# Altium PCB FPW1-0-2.PcbDoc (part 11 of 11)
Units mm, origin at the board's own origin, x right, y up, seen from the top; angles counter-clockwise.
Board outline 85 x 56 mm, 4 copper layers (Top Layer, GND_Plane, 3V3_Plane, Bottom Layer); 182 components, 321 nets, 1106 pads, 360 vias.
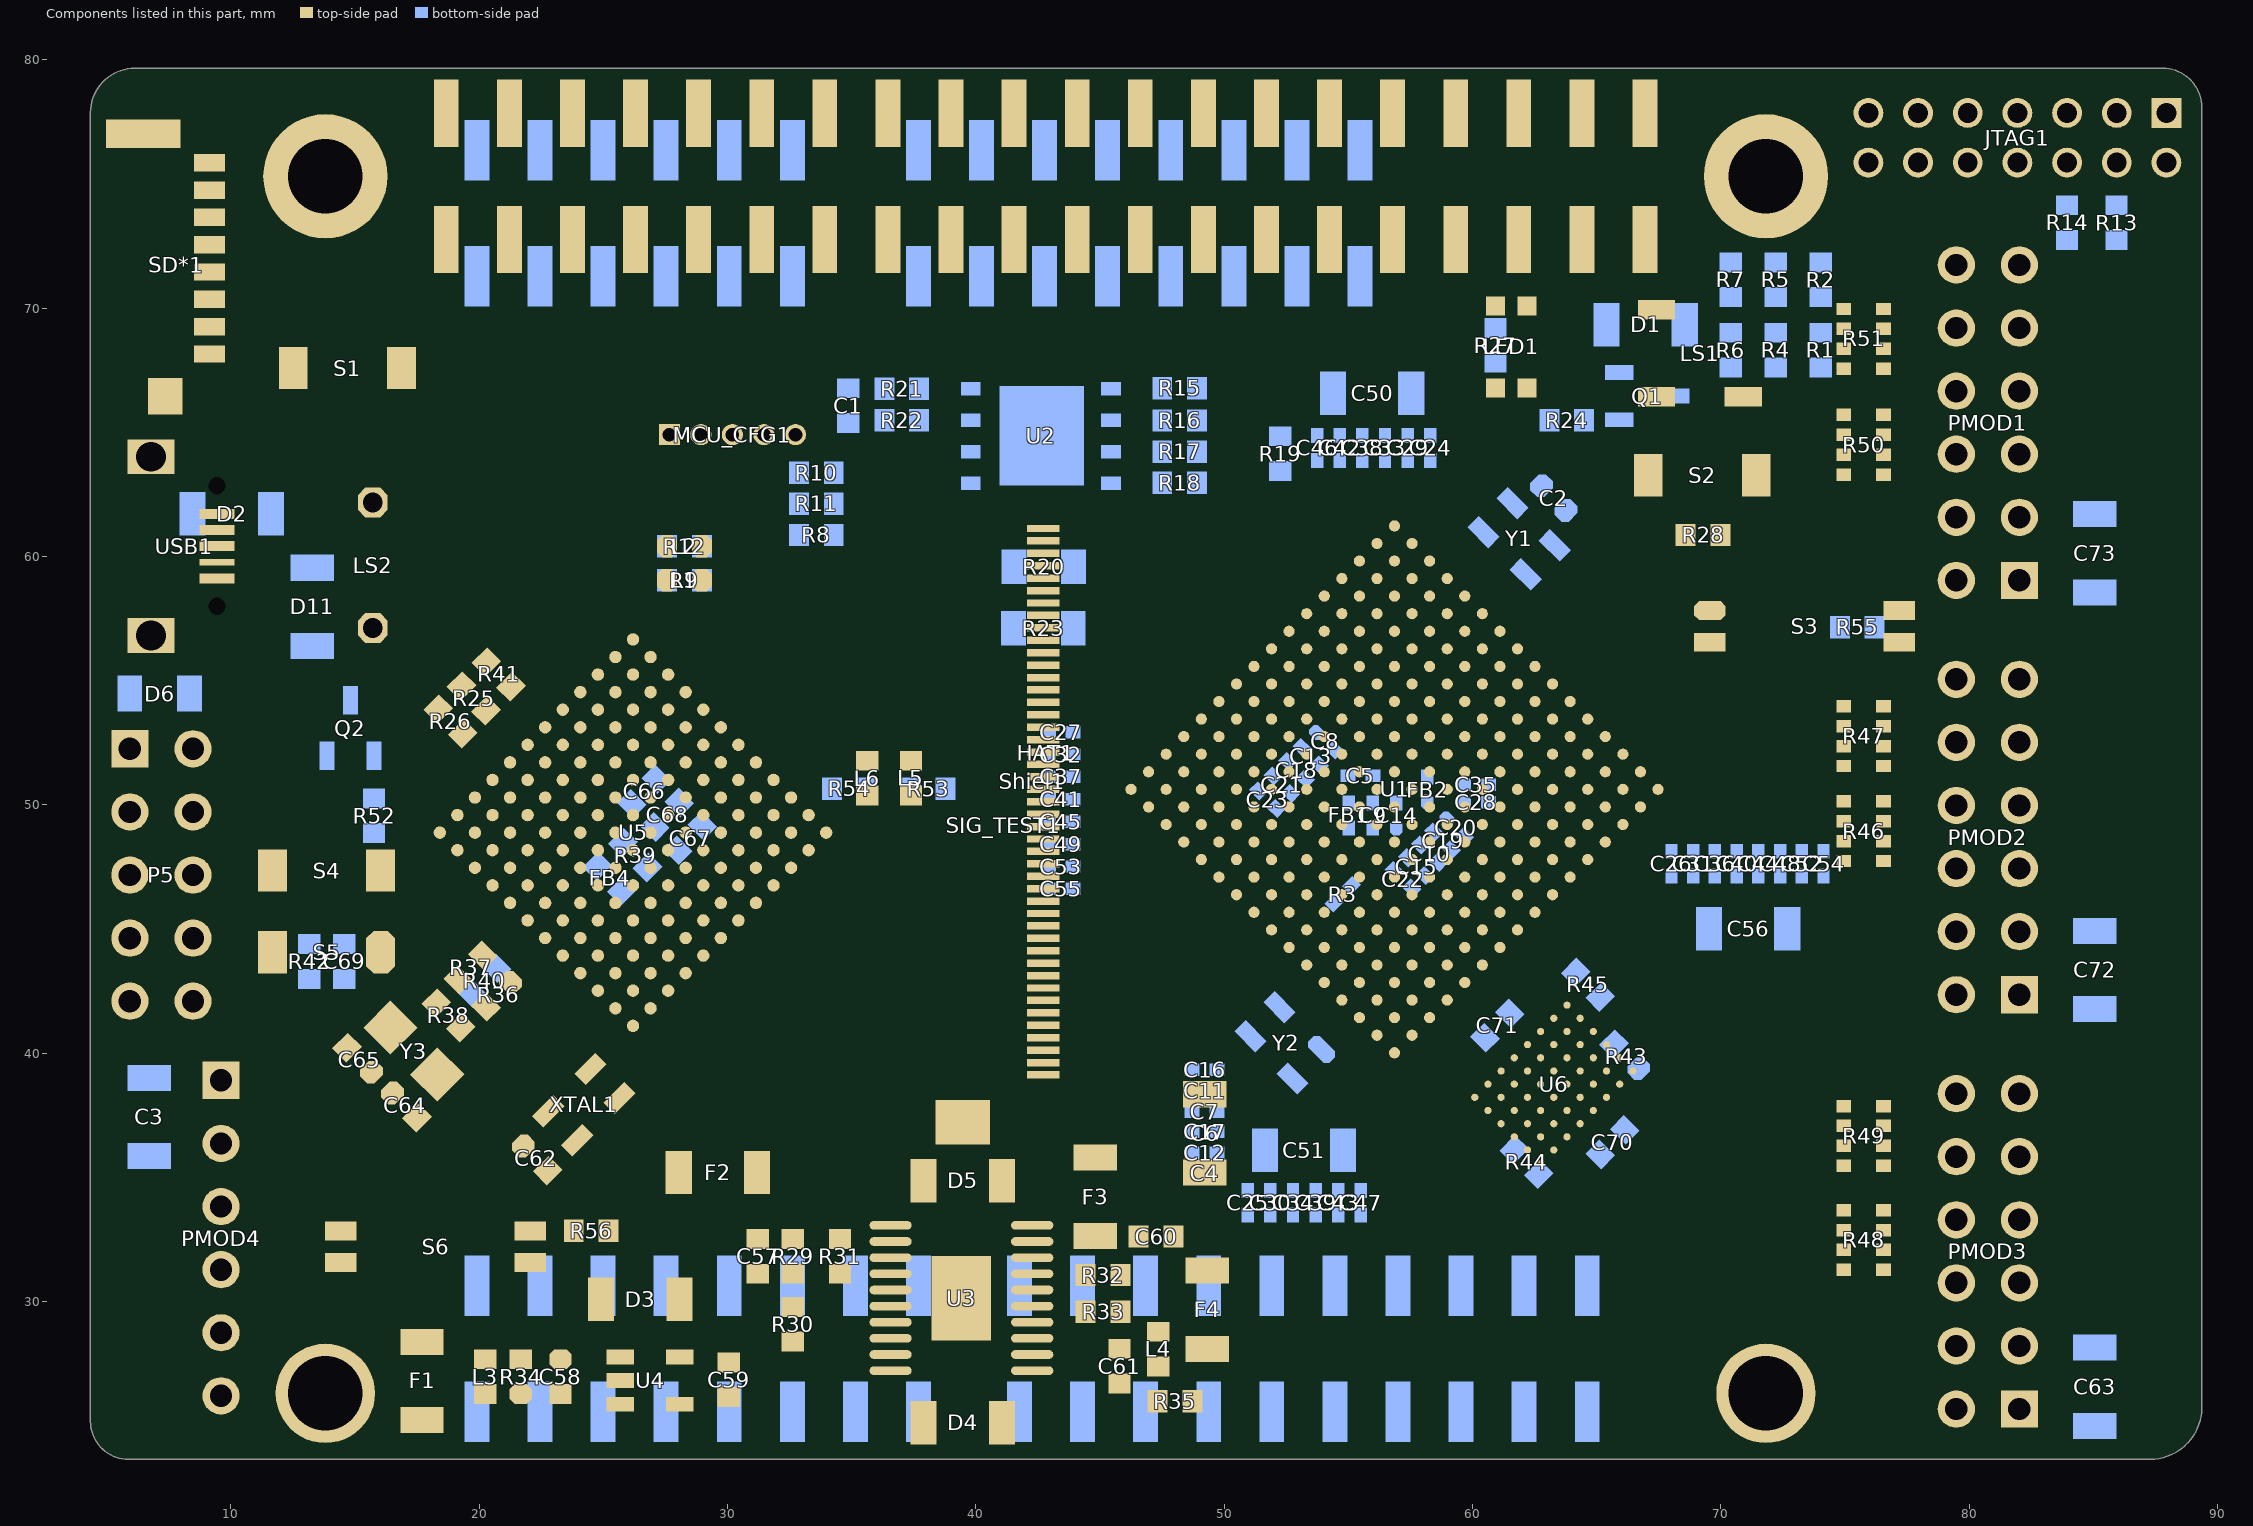
[diagram p13: the components of this part, seen from the top]

## Via types
v1: diameter 0.45, hole 0.2, Top Layer to Bottom Layer, tented both sides, 280 vias
v2: diameter 0.61, hole 0.33, Top Layer to Bottom Layer, tented both sides, 40 vias
v3: diameter 0.403, hole 0.2, Top Layer to Bottom Layer, tented both sides, 15 vias
v4: diameter 0.5, hole 0.2, Top Layer to Bottom Layer, tented both sides, 12 vias
v5: diameter 0.864, hole 0.508, Top Layer to Bottom Layer, tented both sides, 11 vias
v6: diameter 0.864, hole 0.356, Top Layer to Bottom Layer, tented both sides, 1 vias
v7: diameter 0.864, hole 0.381, Top Layer to Bottom Layer, tented both sides, 1 vias

## Nets (pads, with @x,y where several pads share a name; then routed paths per layer and width w, separated by ;. In a path a pad name is that pad's centre, name@x,y a point inside that pad or via, vN(x,y) a via of type N, cw(c..) or ccw(c..) an arc to the next point about the centre after c; other vN are vias at no path point) (continued)
copper on no net: (continued)
  Top Layer w0.025: 88.214,53.226 88.214,53.387 ; 88.214,54.699 88.214,54.936 ; 88.214,57.925 88.214,59.686 ; 88.214,63.919 88.214,64.08 ; 88.214,65.062 88.214,65.198 ; 88.214,67.246 88.214,67.407 ; 88.214,67.602 88.214,67.763 ; 88.214,68.161 88.214,68.22 ; 88.214,68.644 88.214,68.652 ; 88.214,69.888 88.214,70.1 ; 88.24,45.453 88.24,45.817 ; 88.24,47.053 88.24,47.24 ; 88.24,47.307 88.24,47.57 ; 88.24,48.501 88.24,48.764 ; 88.24,49.06 88.24,49.17 ; 88.24,50.355 88.24,50.491 ; 88.24,51.625 88.24,51.736 ; 88.24,52.286 88.24,52.447 ; 88.24,53.226 88.24,53.387 ; 88.24,54.724 88.24,54.936 ; 88.24,57.925 88.24,59.711 ; 88.24,63.944 88.24,64.08 ; 88.24,65.062 88.24,65.198 ; 88.24,67.246 88.24,67.407 ; 88.24,67.475 88.24,67.509 ; 88.24,67.602 88.24,67.763 ; 88.24,69.913 88.24,70.074 ; 88.265,45.453 88.265,45.792 ; 88.265,47.079 88.265,47.57 ; 88.265,48.501 88.265,48.764 ; 88.265,49.06 88.265,49.17 ; 88.265,50.33 88.265,50.491 ; 88.265,51.625 88.265,51.736 ; 88.265,52.311 88.265,52.498 ; 88.265,53.226 88.265,53.412 ; 88.265,54.724 88.265,54.936 ; 88.265,57.925 88.265,59.711 ; 88.265,63.944 88.265,64.08 ; 88.265,65.062 88.265,65.198 ; 88.265,67.272 88.265,67.407 ; 88.265,67.475 88.265,67.763 ; 88.265,69.939 88.265,70.049 ; 88.29,45.453 88.29,45.792 ; 88.29,47.104 88.29,47.545 ; 88.29,48.527 88.29,48.764 ; 88.29,49.06 88.29,49.17 ; 88.29,50.33 88.29,50.466 ; 88.29,51.625 88.29,51.736 ; 88.29,52.337 88.29,52.523 ; 88.29,53.226 88.29,53.437 ; 88.29,54.724 88.29,54.911 ; 88.29,57.925 88.29,59.711 ; 88.29,63.97 88.29,64.08 ; 88.29,65.062 88.29,65.198 ; 88.29,67.297 88.29,67.407 ; 88.29,67.501 88.29,67.763 ; 88.29,69.939 88.29,69.998 ; 88.316,45.479 88.316,45.767 ; 88.316,47.13 88.316,47.545 ; 88.316,48.527 88.316,48.738 ; 88.316,49.06 88.316,49.196 ; 88.316,50.127 88.316,50.186 ; 88.316,50.279 88.316,50.466 ; 88.316,51.651 88.316,51.71 ; 88.316,52.362 88.316,52.599 ; 88.316,53.226 88.316,53.463 ; 88.316,54.724 88.316,54.885 ; 88.316,57.95 88.316,58.746 ; 88.316,59.144 88.316,59.711 ; 88.316,63.97 88.316,64.08 ; 88.316,65.062 88.316,65.198 ; 88.316,67.323 88.316,67.357 ; 88.316,67.501 88.316,67.763 ; 88.341,45.504 88.341,45.741 ; 88.341,47.13 88.341,47.545 ; 88.341,48.527 88.341,48.738 ; 88.341,49.085 88.341,49.196 ; 88.341,50.152 88.341,50.466 ; 88.341,52.387 88.341,52.675 ; 88.341,53.226 88.341,53.463 ; 88.341,54.724 88.341,54.86 ; 88.341,57.95 88.341,58.467 ; 88.341,59.449 88.341,59.711 ; 88.341,63.995 88.341,64.055 ; 88.341,65.062 88.341,65.198 ; 88.341,67.501 88.341,67.763 ; 88.367,45.529 88.367,45.741 ; 88.367,47.18 88.367,47.545 ; 88.367,48.552 88.367,48.738 ; 88.367,49.085 88.367,49.196 ; 88.367,50.178 88.367,50.466 ; 88.367,52.413 88.367,52.777 ; 88.367,53.175 88.367,53.463 ; 88.367,54.724 88.367,54.86 ; 88.367,58.001 88.367,58.34 ; 88.367,64.021 88.367,64.055 ; 88.367,65.062 88.367,65.198 ; 88.367,67.526 88.367,67.763 ; 88.392,45.555 88.392,45.716 ; 88.392,47.206 88.392,47.545 ; 88.392,48.552 88.392,48.713 ; 88.392,49.111 88.392,49.196 ; 88.392,50.203 88.392,50.466 ; 88.392,52.438 88.392,52.802 ; 88.392,52.946 88.392,52.98 ; 88.392,53.099 88.392,53.463 ; 88.392,54.699 88.392,54.834 ; 88.392,58.026 88.392,58.238 ; 88.392,65.062 88.392,65.198 ; 88.392,67.526 88.392,67.763 ; 88.417,45.58 88.417,45.716 ; 88.417,47.257 88.417,47.519 ; 88.417,48.578 88.417,48.713 ; 88.417,49.111 88.417,49.196 ; 88.417,50.203 88.417,50.44 ; 88.417,52.464 88.417,53.463 ; 88.417,54.699 88.417,54.809 ; 88.417,65.062 88.417,65.198 ; 88.417,67.526 88.417,67.763 ; 88.443,45.631 88.443,45.69 ; 88.443,47.307 88.443,47.519 ; 88.443,48.578 88.443,48.713 ; 88.443,49.136 88.443,49.196 ; 88.443,50.228 88.443,50.44 ; 88.443,52.489 88.443,53.463 ; 88.443,54.673 88.443,54.784 ; 88.443,65.062 88.443,65.172 ; 88.443,67.551 88.443,67.738 ; 88.468,47.358 88.468,47.494 ; 88.468,48.603 88.468,48.713 ; 88.468,49.162 88.468,49.17 ; 88.468,50.254 88.468,50.44 ; 88.468,52.54 88.468,53.437 ; 88.468,54.648 88.468,54.758 ; 88.468,65.062 88.468,65.172 ; 88.468,67.551 88.468,67.738 ; 88.494,48.628 88.494,48.688 ; 88.494,50.254 88.494,50.415 ; 88.494,52.591 88.494,53.437 ; 88.494,54.623 88.494,54.733 ; 88.494,65.062 88.494,65.172 ; 88.494,67.577 88.494,67.738 ; 88.519,48.679 88.519,48.688 ; 88.519,50.279 88.519,50.415 ; 88.519,52.642 88.519,53.412 ; 88.519,54.597 88.519,54.707 ; 88.519,65.087 88.519,65.172 ; 88.519,67.577 88.519,67.738 ; 88.544,50.279 88.544,50.389 ; 88.544,52.692 88.544,53.387 ; 88.544,54.597 88.544,54.682 ; 88.544,65.087 88.544,65.172 ; 88.544,67.627 88.544,67.738 ; 88.57,50.305 88.57,50.389 ; 88.57,52.743 88.57,53.336 ; 88.57,54.572 88.57,54.657 ; 88.57,65.113 88.57,65.172 ; 88.57,67.653 88.57,67.738 ; 88.595,50.305 88.595,50.364 ; 88.595,52.819 88.595,53.285 ; 88.595,54.546 88.595,54.631 ; 88.595,65.113 88.595,65.147 ; 88.595,67.704 88.595,67.712 ; 88.621,52.946 88.621,53.133 ; 88.621,54.521 88.621,54.606 ; 88.646,54.496 88.646,54.555 ; 88.671,54.47 88.671,54.53 ; 88.697,54.496 88.697,54.504
  Top Layer w0.051: 53.179,29.934 53.501,29.934 ; 53.179,29.985 53.653,29.985 ; 53.179,30.035 54.009,30.035 ; 53.23,30.086 54.009,30.086 ; 53.332,30.797 53.602,30.797 ; 53.332,30.848 53.602,30.848 ; 53.382,28.765 53.907,28.765 ; 53.382,28.816 53.704,28.816 ; 53.382,28.867 53.602,28.867 ; 53.382,28.918 53.602,28.918 ; 53.382,28.969 53.653,28.969 ; 53.382,29.019 53.653,29.019 ; 53.382,29.07 53.704,29.07 ; 53.382,30.137 53.958,30.137 ; 53.382,30.696 53.704,30.696 ; 53.382,30.747 53.653,30.747 ; 53.382,30.899 53.552,30.899 ; 53.433,28.715 54.517,28.715 ; 53.433,29.121 53.704,29.121 ; 53.433,29.172 53.755,29.172 ; 53.433,30.594 53.755,30.594 ; 53.433,30.645 53.704,30.645 ; 53.484,28.664 55.431,28.664 ; 53.484,29.223 53.755,29.223 ; 53.484,29.273 53.806,29.273 ; 53.484,30.493 53.806,30.493 ; 53.484,30.543 53.755,30.543 ; 53.535,29.324 53.806,29.324 ; 53.535,29.375 53.856,29.375 ; 53.535,30.188 53.856,30.188 ; 53.535,30.391 53.806,30.391 ; 53.535,30.442 53.806,30.442 ; 53.586,28.613 55.888,28.613 ; 53.586,29.426 53.856,29.426 ; 53.586,29.477 53.907,29.477 ; 53.586,30.29 53.806,30.29 ; 53.586,30.34 53.806,30.34 ; 53.636,29.527 53.907,29.527 ; 53.687,29.578 53.958,29.578 ; 53.687,29.629 53.958,29.629 ; 53.738,29.68 54.009,29.68 ; 53.738,29.731 54.009,29.731 ; 53.738,29.781 54.009,29.781 ; 53.738,29.985 54.06,29.985 ; 53.789,28.562 55.939,28.562 ; 53.789,29.832 54.06,29.832 ; 53.789,29.883 54.06,29.883 ; 53.789,29.934 54.06,29.934 ; 54.094,30.29 54.669,30.29 ; 54.094,30.34 55.634,30.34 ; 54.094,30.391 55.634,30.391 ; 54.094,30.696 54.771,30.696 ; 54.144,28.867 54.72,28.867 ; 54.144,28.918 55.584,28.918 ; 54.144,28.969 55.736,28.969 ; 54.144,29.019 55.736,29.019 ; 54.144,29.07 54.415,29.07 ; 54.144,29.121 54.415,29.121 ; 54.144,29.172 54.415,29.172 ; 54.144,29.223 54.415,29.223 ; 54.144,29.273 54.415,29.273 ; 54.144,29.324 54.415,29.324 ; 54.144,29.375 54.568,29.375 ; 54.144,29.426 55.736,29.426 ; 54.144,29.477 55.736,29.477 ; 54.144,29.527 55.685,29.527 ; 54.144,29.578 55.634,29.578 ; 54.144,29.629 54.415,29.629 ; 54.144,29.68 54.415,29.68 ; 54.144,29.731 54.364,29.731 ; 54.144,29.781 54.415,29.781 ; 54.144,29.832 55.126,29.832 ; 54.144,29.883 55.634,29.883 ; 54.144,29.934 55.634,29.934 ; 54.144,29.985 55.634,29.985 ; 54.144,30.035 54.364,30.035 ; 54.144,30.086 54.364,30.086 ; 54.144,30.137 54.364,30.137 ; 54.144,30.188 54.364,30.188 ; 54.144,30.239 54.364,30.239 ; 54.144,30.442 55.584,30.442 ; 54.144,30.594 54.364,30.594 ; 54.144,30.645 54.568,30.645 ; 54.144,30.747 55.025,30.747 ; 54.195,28.816 54.364,28.816 ; 54.246,30.797 55.228,30.797 ; 54.348,28.511 55.939,28.511 ; 54.5,30.848 55.431,30.848 ; 54.551,30.493 55.482,30.493 ; 54.602,29.07 55.736,29.07 ; 54.703,30.899 55.482,30.899 ; 54.957,30.95 55.482,30.95 ; 55.008,30.035 55.634,30.035 ; 55.11,29.629 55.431,29.629 ; 55.16,31.001 55.482,31.001 ; 55.211,28.461 55.888,28.461 ; 55.364,30.29 55.634,30.29 ; 55.414,29.832 55.634,29.832 ; 55.414,30.086 55.685,30.086 ; 55.414,30.137 55.685,30.137 ; 55.414,30.188 55.685,30.188 ; 55.414,30.239 55.685,30.239 ; 55.465,29.121 55.736,29.121 ; 55.465,29.375 55.736,29.375 ; 55.516,29.172 55.736,29.172 ; 55.516,29.223 55.736,29.223 ; 55.516,29.273 55.736,29.273 ; 55.516,29.324 55.736,29.324 ; 56.329,28.562 56.65,28.562 ; 56.329,28.613 56.701,28.613 ; 56.329,29.883 56.752,29.883 ; 56.329,29.934 56.65,29.934 ; 56.329,29.985 56.549,29.985 ; 56.38,28.511 56.549,28.511 ; 56.38,28.664 56.752,28.664 ; 56.38,29.832 56.854,29.832 ; 56.38,30.34 58.886,30.34 ; 56.38,30.391 58.936,30.391 ; 56.38,30.442 58.936,30.442 ; 56.43,28.715 56.803,28.715 ; 56.43,29.781 56.904,29.781 ; 56.43,30.29 57.158,30.29 ; 56.481,28.765 56.904,28.765 ; 56.532,28.816 56.955,28.816 ; 56.532,29.731 57.006,29.731 ; 56.634,28.867 57.006,28.867 ; 56.634,29.68 57.057,29.68 ; 56.684,28.918 57.057,28.918 ; 56.684,29.629 57.108,29.629 ; 56.735,28.969 57.108,28.969 ; 56.786,29.019 57.158,29.019 ; 56.786,29.578 57.158,29.578 ; 56.786,30.493 58.936,30.493 ; 56.837,29.07 57.158,29.07 ; 56.837,29.527 57.158,29.527 ; 56.888,29.121 57.209,29.121 ; 56.888,29.477 57.209,29.477 ; 56.938,29.172 57.209,29.172 ; 56.938,29.223 57.209,29.223 ; 56.938,29.375 57.209,29.375 ; 56.938,29.426 57.209,29.426 ; 56.989,29.273 57.209,29.273 ; 56.989,29.324 57.209,29.324 ; 57.345,30.899 57.616,30.899 ; 57.345,30.95 57.616,30.95 ; 57.396,30.086 57.666,30.086 ; 57.396,30.137 57.666,30.137 ; 57.396,30.188 57.666,30.188 ; 57.396,30.239 57.666,30.239 ; 57.396,30.29 57.666,30.29 ; 57.396,30.543 57.666,30.543 ; 57.396,30.594 57.666,30.594 ; 57.396,30.645 57.666,30.645 ; 57.396,30.696 57.666,30.696 ; 57.396,30.747 57.616,30.747 ; 57.396,30.797 57.616,30.797 ; 57.396,30.848 57.616,30.848 ; 57.396,31.001 57.616,31.001 ; 57.446,29.223 57.717,29.223 ; 57.446,29.273 57.717,29.273 ; 57.446,29.324 57.717,29.324 ; 57.446,29.375 57.717,29.375 ; 57.446,29.426 57.717,29.426 ; 57.446,29.477 57.717,29.477 ; 57.446,29.527 57.717,29.527 ; 57.446,29.578 57.717,29.578 ; 57.446,29.629 57.717,29.629 ; 57.446,29.68 57.717,29.68 ; 57.446,29.731 57.717,29.731 ; 57.446,29.781 57.717,29.781 ; 57.446,29.832 57.717,29.832 ; 57.446,29.883 57.717,29.883 ; 57.446,29.934 57.666,29.934 ; 57.446,29.985 57.666,29.985 ; 57.446,30.035 57.666,30.035 ; 57.446,31.051 57.565,31.051 ; 57.497,28.41 57.768,28.41 ; 57.497,28.461 57.768,28.461 ; 57.497,28.511 57.768,28.511 ; 57.497,28.562 57.768,28.562 ; 57.497,28.613 57.768,28.613 ; 57.497,28.664 57.768,28.664 ; 57.497,28.715 57.768,28.715 ; 57.497,28.765 57.768,28.765 ; 57.497,28.816 57.768,28.816 ; 57.497,28.867 57.768,28.867 ; 57.497,28.918 57.768,28.918 ; 57.497,28.969 57.768,28.969 ; 57.497,29.019 57.717,29.019 ; 57.497,29.07 57.717,29.07 ; 57.497,29.121 57.717,29.121 ; 57.497,29.172 57.717,29.172 ; 57.548,28.359 57.768,28.359 ; 57.904,29.07 58.225,29.07 ; 57.904,29.121 58.174,29.121 ; 57.904,29.172 58.174,29.172 ; 57.904,29.223 58.174,29.223 ; 57.904,29.273 58.174,29.273 ; 57.904,29.324 58.174,29.324 ; 57.904,29.375 58.225,29.375 ; 57.954,28.969 58.428,28.969 ; 57.954,29.019 58.327,29.019 ; 57.954,29.426 58.225,29.426 ; 57.954,29.477 58.276,29.477 ; 58.005,29.527 58.327,29.527 ; 58.005,29.578 58.378,29.578 ; 58.056,28.918 58.53,28.918 ; 58.056,29.629 58.428,29.629 ; 58.107,28.867 58.682,28.867 ; 58.107,29.68 58.479,29.68 ; 58.158,29.731 58.53,29.731 ; 58.158,30.899 58.581,30.899 ; 58.158,30.95 58.479,30.95 ; 58.158,31.001 58.378,31.001 ; 58.208,28.816 58.784,28.816 ; 58.208,29.781 58.632,29.781 ; 58.208,30.848 58.682,30.848 ; 58.259,30.797 58.784,30.797 ; 58.31,28.765 58.936,28.765 ; 58.31,29.832 58.682,29.832 ; 58.361,29.883 58.733,29.883 ; 58.361,30.747 58.835,30.747 ; 58.412,28.715 59.038,28.715 ; 58.412,29.934 58.784,29.934 ; 58.462,29.985 58.784,29.985 ; 58.462,30.696 58.886,30.696 ; 58.513,30.035 58.784,30.035 ; 58.564,28.664 59.038,28.664 ; 58.564,30.086 58.733,30.086 ; 58.564,30.645 58.886,30.645 ; 58.666,28.613 59.038,28.613 ; 58.666,30.594 58.835,30.594 ; 58.818,28.562 58.987,28.562 ; 59.428,28.765 61.984,28.765 ; 59.428,28.816 62.035,28.816 ; 59.478,28.715 60.918,28.715 ; 59.478,28.867 62.086,28.867 ; 59.732,29.223 61.781,29.223 ; 59.732,29.273 61.781,29.273 ; 59.732,29.324 61.781,29.324 ; 59.732,29.375 61.781,29.375 ; 59.732,29.426 60.003,29.426 ; 59.732,29.477 60.003,29.477 ; 59.732,29.527 60.003,29.527 ; 59.732,29.578 60.003,29.578 ; 59.732,29.629 60.003,29.629 ; 59.732,29.68 60.003,29.68 ; 59.732,29.731 60.003,29.731 ; 59.732,29.781 60.003,29.781 ; 59.732,29.832 60.003,29.832 ; 59.732,29.883 60.003,29.883 ; 59.732,29.934 60.003,29.934 ; 59.732,29.985 60.003,29.985 ; 59.732,30.035 60.003,30.035 ; 59.732,30.086 60.003,30.086 ; 59.732,30.137 60.003,30.137 ; 59.732,30.188 60.714,30.188 ; 59.732,30.239 61.832,30.239 ; 59.732,30.29 61.781,30.29 ; 59.732,30.34 61.73,30.34 ; 59.783,30.391 59.952,30.391 ; 59.834,29.172 60.257,29.172 ; 60.24,29.68 61.121,29.68 ; 60.24,29.731 61.324,29.731 ; 60.24,29.781 61.375,29.781 ; 60.24,29.832 61.324,29.832 ; 60.291,28.918 62.035,28.918 ; 60.393,30.848 60.664,30.848 ; 60.393,30.899 60.664,30.899 ; 60.393,30.95 60.664,30.95 ; 60.393,31.001 60.664,31.001 ; 60.393,31.051 60.613,31.051 ; 60.444,30.543 60.714,30.543 ; 60.444,30.594 61.07,30.594 ; 60.444,30.645 61.73,30.645 ; 60.444,30.696 61.781,30.696 ; 60.444,30.747 61.781,30.747 ; 60.444,30.797 60.714,30.797 ; 60.494,30.391 61.629,30.391 ; 60.494,30.442 60.765,30.442 ; 60.494,30.493 60.714,30.493 ; 60.596,28.969 60.867,28.969 ; 60.596,29.019 60.867,29.019 ; 60.596,29.07 60.867,29.07 ; 60.596,29.121 60.867,29.121 ; 60.596,29.172 60.867,29.172 ; 60.647,28.359 60.918,28.359 ; 60.647,28.41 60.918,28.41 ; 60.647,28.461 60.918,28.461 ; 60.647,28.511 60.918,28.511 ; 60.647,28.562 60.918,28.562 ; 60.647,28.613 60.918,28.613 ; 60.647,28.664 60.918,28.664 ; 60.698,28.308 60.867,28.308 ; 60.901,29.883 61.273,29.883 ; 60.901,30.797 61.781,30.797 ; 61.51,29.121 61.73,29.121 ; 61.51,29.172 61.781,29.172 ; 61.51,29.426 61.781,29.426 ; 61.51,30.188 61.832,30.188 ; 61.561,29.477 61.781,29.477 ; 61.561,29.527 61.832,29.527 ; 61.561,29.578 61.832,29.578 ; 61.561,29.629 61.832,29.629 ; 61.561,29.68 61.832,29.68 ; 61.561,29.731 61.832,29.731 ; 61.561,29.781 61.832,29.781 ; 61.561,30.137 61.832,30.137 ; 61.612,29.832 61.832,29.832 ; 61.612,29.883 61.883,29.883 ; 61.612,29.934 61.883,29.934 ; 61.612,29.985 61.883,29.985 ; 61.612,30.035 61.883,30.035 ; 61.612,30.086 61.883,30.086 ; 61.714,28.969 61.984,28.969 ; 62.476,28.41 62.746,28.41 ; 62.476,28.461 62.746,28.461 ; 62.476,29.578 62.899,29.578 ; 62.476,29.629 63.305,29.629 ; 62.476,29.68 63.712,29.68 ; 62.526,28.359 62.746,28.359 ; 62.526,28.511 62.746,28.511 ; 62.526,28.562 62.797,28.562 ; 62.526,28.613 62.797,28.613 ; 62.526,28.664 64.575,28.664 ; 62.526,28.715 64.118,28.715 ; 62.526,29.731 64.067,29.731 ; 62.577,28.765 63.61,28.765 ; 62.577,28.816 63.305,28.816 ; 62.577,28.867 62.848,28.867 ; 62.577,28.918 62.848,28.918 ; 62.577,30.391 64.626,30.391 ; 62.577,30.442 63.712,30.442 ; 62.628,28.969 62.899,28.969 ; 62.628,29.019 62.899,29.019 ; 62.628,29.07 62.899,29.07 ; 62.628,29.121 62.899,29.121 ; 62.628,29.172 62.899,29.172 ; 62.628,30.34 65.134,30.34 ; 62.679,29.223 62.95,29.223 ; 62.679,29.273 62.95,29.273 ; 62.679,29.324 64.016,29.324 ; 62.679,29.375 63.661,29.375 ; 62.679,30.493 63.661,30.493 ; 62.73,29.426 62.899,29.426 ; 62.78,29.781 64.067,29.781 ; 62.933,30.29 63.254,30.29 ; 62.933,30.543 63.204,30.543 ; 62.933,30.594 63.204,30.594 ; 62.933,30.645 63.204,30.645 ; 62.933,30.696 63.204,30.696 ; 62.933,30.747 63.204,30.747 ; 62.933,30.797 63.204,30.797 ; 62.933,30.848 63.204,30.848 ; 62.984,28.613 65.083,28.613 ; 62.984,29.527 63.254,29.527 ; 62.984,29.578 63.254,29.578 ; 62.984,29.832 64.067,29.832 ; 62.984,29.883 63.254,29.883 ; 62.984,29.934 63.254,29.934 ; 62.984,29.985 63.254,29.985 ; 62.984,30.035 63.254,30.035 ; 62.984,30.086 63.254,30.086 ; 62.984,30.137 63.254,30.137 ; 62.984,30.188 63.254,30.188 ; 62.984,30.239 63.204,30.239 ; 62.984,30.899 63.153,30.899 ; 63.034,28.867 63.305,28.867 ; 63.034,28.918 63.305,28.918 ; 63.034,28.969 63.305,28.969 ; 63.034,29.019 63.305,29.019 ; 63.034,29.07 63.305,29.07 ; 63.034,29.121 63.305,29.121 ; 63.034,29.172 63.356,29.172 ; 63.034,29.223 64.016,29.223 ; 63.034,29.273 64.016,29.273 ; 63.034,29.426 63.254,29.426 ; 63.034,29.477 63.254,29.477 ; 63.441,28.562 65.236,28.562 ; 63.593,29.883 63.712,29.883 ; 63.746,29.07 64.016,29.07 ; 63.746,29.121 64.016,29.121 ; 63.746,29.172 64.016,29.172 ; 63.746,29.375 64.626,29.375 ; 63.746,29.426 64.626,29.426 ; 63.796,28.969 64.423,28.969 ; 63.796,29.019 64.423,29.019 ; 63.796,29.477 64.016,29.477 ; 63.796,29.527 64.067,29.527 ; 63.796,29.578 64.067,29.578 ; 63.796,29.629 64.067,29.629 ; 63.796,29.68 64.067,29.68 ; 63.796,30.29 65.185,30.29 ; 63.847,28.918 64.423,28.918 ; 63.847,29.883 64.118,29.883 ; 63.847,29.934 64.118,29.934 ; 63.847,29.985 64.118,29.985 ; 63.847,30.035 64.118,30.035 ; 63.847,30.086 64.118,30.086 ; 63.847,30.137 64.118,30.137 ; 63.847,30.239 65.185,30.239 ; 63.847,30.442 64.016,30.442 ; 63.898,28.867 64.321,28.867 ; 63.898,30.188 64.118,30.188 ; 63.949,28.511 65.236,28.511 ; 64.101,29.324 64.677,29.324 ; 64.152,29.477 64.626,29.477 ; 64.203,29.527 64.677,29.527 ; 64.254,29.07 64.372,29.07 ; 64.254,30.188 65.185,30.188 ; 64.254,30.442 64.524,30.442 ; 64.254,30.493 64.524,30.493 ; 64.254,30.543 64.524,30.543 ; 64.254,30.594 64.524,30.594 ; 64.254,30.645 64.524,30.645 ; 64.254,30.696 64.524,30.696 ; 64.254,30.747 64.524,30.747 ; 64.254,30.797 64.524,30.797 ; 64.254,30.848 64.524,30.848 ; 64.254,30.899 64.524,30.899 ; 64.254,30.95 64.524,30.95 ; 64.254,31.001 64.524,31.001 ; 64.254,31.051 64.474,31.051 ; 64.304,29.578 64.778,29.578 ; 64.304,29.68 64.931,29.68 ; 64.304,29.731 65.032,29.731 ; 64.304,29.781 65.083,29.781 ; 64.304,29.832 64.575,29.832 ; 64.304,29.883 64.575,29.883 ; 64.304,29.934 64.575,29.934 ; 64.304,29.985 64.575,29.985 ; 64.304,30.035 64.575,30.035 ; 64.304,30.086 64.524,30.086 ; 64.304,30.137 64.524,30.137 ; 64.355,29.629 64.829,29.629 ; 64.406,29.223 64.728,29.223 ; 64.406,29.273 64.677,29.273 ; 64.457,28.461 65.236,28.461 ; 64.457,29.121 64.778,29.121 ; 64.457,29.172 64.728,29.172 ; 64.508,29.019 65.185,29.019 ; 64.508,29.07 64.778,29.07 ; 64.558,28.969 65.185,28.969 ; 64.609,28.918 65.134,28.918 ; 64.609,30.848 64.982,30.848 ; 64.609,30.899 64.931,30.899 ; 64.66,28.867 65.083,28.867 ; 64.66,30.797 64.982,30.797 ; 64.66,30.95 64.88,30.95 ; 64.711,29.832 65.083,29.832 ; 64.711,30.747 65.032,30.747 ; 64.762,28.816 64.982,28.816 ; 64.762,30.696 65.083,30.696 ; 64.812,29.883 65.083,29.883 ; 64.812,30.645 65.134,30.645 ; 64.863,30.594 65.185,30.594 ; 64.914,29.07 65.185,29.07 ; 64.914,29.934 65.083,29.934 ; 64.914,30.543 65.236,30.543 ; 64.965,28.41 65.185,28.41 ; 64.965,30.493 65.286,30.493 ; 65.016,29.121 65.083,29.121 ; 65.016,30.391 65.236,30.391 ; 65.016,30.442 65.286,30.442 ; 65.879,29.934 66.201,29.934 ; 65.879,29.985 66.15,29.985 ; 65.879,30.035 66.15,30.035 ; 65.879,30.086 66.15,30.086 ; 65.879,30.137 66.15,30.137 ; 65.879,30.188 66.15,30.188 ; 65.879,30.239 66.15,30.239 ; 65.879,30.29 66.15,30.29 ; 65.879,30.34 66.15,30.34 ; 65.879,30.391 66.15,30.391 ; 65.93,28.867 66.607,28.867 ; 65.93,28.918 66.201,28.918 ; 65.93,28.969 66.201,28.969 ; 65.93,29.019 66.556,29.019 ; 65.93,29.781 66.556,29.781 ; 65.93,29.832 66.201,29.832 ; 65.93,29.883 66.201,29.883 ; 65.93,30.442 66.201,30.442 ; 65.93,30.493 66.556,30.493 ; 65.93,30.543 66.556,30.543 ; 65.981,28.765 66.556,28.765 ; 65.981,28.816 66.556,28.816 ; 65.981,29.07 66.556,29.07 ; 65.981,29.121 66.506,29.121 ; 65.981,29.68 66.506,29.68 ; 65.981,29.731 66.556,29.731 ; 65.981,30.594 66.506,30.594 ; 66.032,28.715 66.506,28.715 ; 66.032,29.172 66.506,29.172 ; 66.032,30.645 66.455,30.645 ; 66.082,30.696 66.404,30.696 ; 66.133,28.664 66.404,28.664 ; 66.133,29.223 66.404,29.223 ; 66.184,29.477 66.455,29.477 ; 66.184,30.747 66.302,30.747 ; 66.235,29.426 66.455,29.426 ; 66.235,29.527 66.506,29.527 ; 66.235,29.578 66.506,29.578 ; 66.235,29.629 66.506,29.629 ; 66.286,29.832 66.556,29.832 ; 66.286,29.883 66.607,29.883 ; 66.286,30.442 66.556,30.442 ; 66.336,28.918 66.607,28.918 ; 66.336,28.969 66.607,28.969 ; 66.336,29.934 66.607,29.934 ; 66.336,29.985 66.607,29.985 ; 66.336,30.035 66.607,30.035 ; 66.336,30.086 66.607,30.086 ; 66.336,30.137 66.607,30.137 ; 66.336,30.188 66.607,30.188 ; 66.336,30.239 66.607,30.239 ; 66.336,30.29 66.607,30.29 ; 66.336,30.34 66.607,30.34 ; 66.336,30.391 66.607,30.391 ; 68.978,29.934 69.3,29.934 ; 68.978,29.985 69.249,29.985 ; 68.978,30.035 69.249,30.035 ; 68.978,30.086 69.249,30.086 ; 68.978,30.137 69.249,30.137 ; 68.978,30.188 69.249,30.188 ; 68.978,30.239 69.249,30.239 ; 68.978,30.29 69.249,30.29 ; 68.978,30.34 69.249,30.34 ; 68.978,30.391 69.249,30.391 ; 69.029,28.867 69.706,28.867 ; 69.029,28.918 69.3,28.918 ; 69.029,28.969 69.3,28.969 ; 69.029,29.019 69.655,29.019 ; 69.029,29.781 69.655,29.781 ; 69.029,29.832 69.3,29.832 ; 69.029,29.883 69.3,29.883 ; 69.029,30.442 69.3,30.442 ; 69.029,30.493 69.655,30.493 ; 69.029,30.543 69.655,30.543 ; 69.08,28.765 69.655,28.765 ; 69.08,28.816 69.655,28.816 ; 69.08,29.07 69.655,29.07 ; 69.08,29.121 69.604,29.121 ; 69.08,29.68 69.604,29.68 ; 69.08,29.731 69.655,29.731 ; 69.08,30.594 69.604,30.594 ; 69.13,28.715 69.604,28.715 ; 69.13,29.172 69.604,29.172 ; 69.13,30.645 69.554,30.645 ; 69.181,30.696 69.503,30.696 ; 69.232,28.664 69.503,28.664 ; 69.232,29.223 69.503,29.223 ; 69.283,29.477 69.554,29.477 ; 69.283,30.747 69.401,30.747 ; 69.334,29.426 69.554,29.426 ; 69.334,29.527 69.604,29.527 ; 69.334,29.578 69.604,29.578 ; 69.334,29.629 69.604,29.629 ; 69.384,29.832 69.655,29.832 ; 69.384,29.883 69.706,29.883 ; 69.384,30.442 69.655,30.442 ; 69.435,28.918 69.706,28.918 ; 69.435,28.969 69.706,28.969 ; 69.435,29.934 69.706,29.934 ; 69.435,29.985 69.706,29.985 ; 69.435,30.035 69.706,30.035 ; 69.435,30.086 69.706,30.086 ; 69.435,30.137 69.706,30.137 ; 69.435,30.188 69.706,30.188 ; 69.435,30.239 69.706,30.239 ; 69.435,30.29 69.706,30.29 ; 69.435,30.34 69.706,30.34 ; 69.435,30.391 69.706,30.391 ; 72.077,29.934 72.398,29.934 ; 72.077,29.985 72.348,29.985 ; 72.077,30.035 72.348,30.035 ; 72.077,30.086 72.348,30.086 ; 72.077,30.137 72.348,30.137 ; 72.077,30.188 72.348,30.188 ; 72.077,30.239 72.348,30.239 ; 72.077,30.29 72.348,30.29 ; 72.077,30.34 72.348,30.34 ; 72.077,30.391 72.348,30.391 ; 72.128,28.867 72.805,28.867 ; 72.128,28.918 72.398,28.918 ; 72.128,28.969 72.398,28.969 ; 72.128,29.019 72.754,29.019 ; 72.128,29.781 72.754,29.781 ; 72.128,29.832 72.398,29.832 ; 72.128,29.883 72.398,29.883 ; 72.128,30.442 72.398,30.442 ; 72.128,30.493 72.754,30.493 ; 72.128,30.543 72.754,30.543 ; 72.178,28.765 72.754,28.765 ; 72.178,28.816 72.754,28.816 ; 72.178,29.07 72.754,29.07 ; 72.178,29.121 72.703,29.121 ; 72.178,29.68 72.703,29.68 ; 72.178,29.731 72.754,29.731 ; 72.178,30.594 72.703,30.594 ; 72.229,28.715 72.703,28.715 ; 72.229,29.172 72.703,29.172 ; 72.229,30.645 72.652,30.645 ; 72.28,30.696 72.602,30.696 ; 72.331,28.664 72.602,28.664 ; 72.331,29.223 72.602,29.223 ; 72.382,29.477 72.652,29.477 ; 72.382,30.747 72.5,30.747 ; 72.432,29.426 72.652,29.426 ; 72.432,29.527 72.703,29.527 ; 72.432,29.578 72.703,29.578 ; 72.432,29.629 72.703,29.629 ; 72.483,29.832 72.754,29.832 ; 72.483,29.883 72.805,29.883 ; 72.483,30.442 72.754,30.442 ; 72.534,28.918 72.805,28.918 ; 72.534,28.969 72.805,28.969 ; 72.534,29.934 72.805,29.934 ; 72.534,29.985 72.805,29.985 ; 72.534,30.035 72.805,30.035 ; 72.534,30.086 72.805,30.086 ; 72.534,30.137 72.805,30.137 ; 72.534,30.188 72.805,30.188 ; 72.534,30.239 72.805,30.239 ; 72.534,30.29 72.805,30.29 ; 72.534,30.34 72.805,30.34 ; 72.534,30.391 72.805,30.391
  Top Layer w0.127: 52.815,26.708 54.762,26.708 ; 52.815,26.835 54.381,26.835 ; 52.815,26.962 54,26.962 ; 52.942,25.311 55.016,25.311 ; 53.069,26.581 53.238,26.581 ; 53.196,25.438 53.746,25.438 ; 53.323,25.184 54.889,25.184 ; 53.45,25.565 53.746,25.565 ; 53.45,25.692 53.746,25.692 ; 53.45,25.819 53.746,25.819 ; 53.45,25.946 53.746,25.946 ; 53.45,26.073 53.746,26.073 ; 53.45,26.2 53.746,26.2 ; 53.45,26.581 54.889,26.581 ; 53.577,24.93 54.381,24.93 ; 53.577,25.057 54.635,25.057 ; 53.577,26.327 53.873,26.327 ; 53.577,26.454 53.873,26.454 ; 53.704,24.803 54.254,24.803 ; 54.212,25.438 55.143,25.438 ; 54.466,25.565 55.143,25.565 ; 54.593,25.692 55.27,25.692 ; 54.593,26.454 55.016,26.454 ; 54.72,25.819 55.27,25.819 ; 54.847,25.946 55.27,25.946 ; 54.847,26.073 55.27,26.073 ; 54.974,26.2 55.27,26.2 ; 54.974,26.327 55.143,26.327 ; 55.482,26.708 57.429,26.708 ; 55.482,26.835 57.048,26.835 ; 55.482,26.962 56.667,26.962 ; 55.609,25.311 57.683,25.311 ; 55.736,26.581 55.905,26.581 ; 55.863,25.438 56.413,25.438 ; 55.99,25.184 57.556,25.184 ; 56.117,25.565 56.413,25.565 ; 56.117,25.692 56.413,25.692 ; 56.117,25.819 56.413,25.819 ; 56.117,25.946 56.413,25.946 ; 56.117,26.073 56.413,26.073 ; 56.117,26.2 56.413,26.2 ; 56.117,26.581 57.556,26.581 ; 56.244,24.93 57.048,24.93 ; 56.244,25.057 57.302,25.057 ; 56.244,26.327 56.54,26.327 ; 56.244,26.454 56.54,26.454 ; 56.371,24.803 56.921,24.803 ; 56.879,25.438 57.81,25.438 ; 57.133,25.565 57.81,25.565 ; 57.26,25.692 57.937,25.692 ; 57.26,26.454 57.683,26.454 ; 57.387,25.819 57.937,25.819 ; 57.514,25.946 57.937,25.946 ; 57.514,26.073 57.937,26.073 ; 57.641,26.2 57.937,26.2 ; 57.641,26.327 57.81,26.327 ; 58.403,25.184 58.826,25.184 ; 58.403,25.311 58.826,25.311 ; 58.403,25.438 58.826,25.438 ; 58.53,24.93 58.826,24.93 ; 58.53,25.057 58.826,25.057 ; 58.53,25.565 58.826,25.565 ; 58.53,25.692 59.334,25.692 ; 58.53,25.819 59.461,25.819 ; 58.53,25.946 58.953,25.946 ; 58.53,26.073 58.953,26.073 ; 58.53,26.2 58.953,26.2 ; 58.53,26.327 58.953,26.327 ; 58.53,26.454 58.953,26.454 ; 58.53,26.581 59.08,26.581 ; 58.53,26.962 58.953,26.962 ; 58.657,24.803 58.826,24.803 ; 58.657,26.708 59.08,26.708 ; 58.657,26.835 58.953,26.835 ; 58.657,27.089 58.826,27.089 ; 59.038,25.565 59.588,25.565 ; 59.165,25.438 59.715,25.438 ; 59.292,25.311 59.842,25.311 ; 59.292,25.946 59.588,25.946 ; 59.419,25.184 60.096,25.184 ; 59.419,26.073 59.715,26.073 ; 59.419,26.2 59.842,26.2 ; 59.546,26.327 60.223,26.327 ; 59.673,25.057 60.223,25.057 ; 59.673,26.454 60.223,26.454 ; 59.673,26.581 60.35,26.581 ; 59.8,24.93 60.35,24.93 ; 59.8,26.708 60.35,26.708 ; 59.927,26.835 60.35,26.835 ; 60.054,24.803 60.35,24.803 ; 60.054,26.962 60.223,26.962

## Polygon pours and split planes (outlines as drawn)
GND on GND_Plane (split plane): 87.928,79.143 88.063,79.116 88.194,79.071 88.319,79.01 88.434,78.933 88.538,78.842 88.629,78.738 88.706,78.623 88.767,78.498 88.812,78.367 88.839,78.232 88.847,78.107 88.846,78.093 88.846,25.729 88.847,25.714 88.838,25.554 88.809,25.382 88.76,25.214 88.693,25.052 88.609,24.899 88.507,24.756 88.391,24.625 88.26,24.509 88.118,24.407 87.964,24.323 87.803,24.256 87.634,24.207 87.462,24.178 87.302,24.169 87.287,24.171 5.88,24.171 5.867,24.169 5.748,24.177 5.617,24.203 5.491,24.246 5.372,24.305 5.262,24.378 5.162,24.466 5.074,24.566 5.001,24.676 4.942,24.795 4.899,24.921 4.873,25.052 4.865,25.171 4.867,25.184 4.867,77.876 4.865,77.889 4.873,78.019 4.897,78.16 4.936,78.298 4.991,78.43 5.06,78.555 5.143,78.671 5.238,78.778 5.345,78.873 5.461,78.956 5.587,79.025 5.719,79.08 5.856,79.12 5.997,79.144 6.127,79.151 6.14,79.15 87.789,79.15 87.803,79.151
3V3 on 3V3_Plane (split plane): 87.928,79.143 88.063,79.116 88.194,79.071 88.319,79.01 88.434,78.933 88.538,78.842 88.629,78.738 88.706,78.623 88.767,78.498 88.812,78.367 88.839,78.232 88.847,78.107 88.846,78.093 88.846,25.729 88.847,25.714 88.838,25.554 88.809,25.382 88.76,25.214 88.693,25.052 88.609,24.899 88.507,24.756 88.391,24.625 88.26,24.509 88.118,24.407 87.964,24.323 87.803,24.256 87.634,24.207 87.462,24.178 87.302,24.169 87.287,24.171 5.88,24.171 5.867,24.169 5.748,24.177 5.617,24.203 5.491,24.246 5.372,24.305 5.262,24.378 5.162,24.466 5.074,24.566 5.001,24.676 4.942,24.795 4.899,24.921 4.873,25.052 4.865,25.171 4.867,25.184 4.867,77.876 4.865,77.889 4.873,78.019 4.897,78.16 4.936,78.298 4.991,78.43 5.06,78.555 5.143,78.671 5.238,78.778 5.345,78.873 5.461,78.956 5.587,79.025 5.719,79.08 5.856,79.12 5.997,79.144 6.127,79.151 6.14,79.15 87.789,79.15 87.803,79.151

## Keep-outs
Keep-Out Layer:
  the board outline again, w0.254

## Other copper
Top Layer:
  rectangle net GND: 26.505,25.616 29.4,27.127
  rectangle net GND: 26.505,25.514 30.493,26.543

## Silkscreen, mask and mechanical layers (free items; w line width, h text height)
Top Overlay:
  drawing of 731 lines, arcs and shapes, not listed
  text "BANK34" at 15.151,78.257 h0.76
  text "5V" at 18.301,75.819 h0.76
  text "PL-N14" at 25.298,75.809 h0.76
  text "PL-N13" at 27.953,75.809 h0.76
  text "PL-P15" at 30.378,75.809 h0.76
  text "PL-T15" at 35.408,75.809 h0.76
  text "PL-T14" at 38.011,75.809 h0.76
  text "PL-T13" at 42.901,75.809 h0.76
  text "PL-R12" at 45.771,75.806 h0.76
  text "PL-T12" at 48.362,75.806 h0.76
  text "PL-P11" at 50.876,75.809 h0.76
  text "PL-T10" at 55.842,75.806 h0.76
  text "PL-P9" at 60.896,75.806 h0.76
  text "PL-T8" at 63.449,75.809 h0.76
  text "PL-R8" at 65.888,75.809 h0.76
  text "5V" at 20.841,75.781 h0.76
  text "GND" at 41.008,75.565 h0.76
  text "PS-E0" at 5.728,75.527 h0.76
  text "GND" at 28.296,75.108 h0.76
  text "GND" at 48.641,75.108 h0.76
  text "GND" at 66.396,75.095 h0.76
  text "GND" at 33.363,75.032 h0.76
  text "GND" at 53.734,75.019 h0.76
  text "GND" at 58.826,75.019 h0.76
  text "GND" at 23.228,74.993 h0.76
  text "PS-E1" at 5.728,74.433 h0.76
  text "3V3" at 18.148,74.27 h0.76
  text "3V3" at 38.456,74.295 h0.76
  text "PL-R15" at 35.458,74.245 h0.76
  text "PL-M16" at 20.066,74.244 h0.76
  text "PL-M14" at 22.809,74.238 h0.76
  text "PL-N16" at 25.311,74.244 h0.76
  text "PL-P16" at 30.124,74.244 h0.76
  text "PL-R16" at 32.995,74.244 h0.76
  text "PL-P14" at 40.653,74.238 h0.76
  text "PL-P13" at 43.205,74.243 h0.76
  text "PL-R13" at 45.707,74.243 h0.76
  text "PL-N12" at 50.47,74.238 h0.76
  text "PL-R11" at 53.213,74.238 h0.76
  text "PL-P10" at 55.918,74.242 h0.76
  text "PL-R10" at 58.56,74.242 h0.76
  text "PL-T9" at 61.163,74.244 h0.76
  text "PL-N9" at 63.462,74.244 h0.76
  text "GND" at 6.261,73.114 h0.76 r90
  text "PS-E2" at 5.728,72.245 h0.76
  text "PL-P6" at 84.1,71.514 h0.76
  text "PL-P8" at 86.604,71.514 h0.76
  text "PL-M12" at 68.161,71.183 h0.76
  text "3V3" at 6.261,70.917 h0.76 r90
  text "B" at 62.014,70.65 h0.76
  text "PS-E3" at 5.728,70.056 h0.76
  text "May the Force be with You ! ! !" at 13.525,69.532 h2.54
  text "PS-E4" at 5.728,68.962 h0.76
  text "PL-T5" at 84.124,68.974 h0.76
  text "PL-T7" at 86.604,68.968 h0.76
  text "PL-K13" at 63.754,68.516 h0.76 r90
  text "PS-E5" at 5.728,67.869 h0.76
  text "PL-R5" at 84.124,66.434 h0.76
  text "PL-R7" at 86.604,66.428 h0.76
  text "PL-L14" at 59.931,66.078 h0.76 r90
  text "PL-L13" at 63.767,65.989 h0.76 r90
  text "G" at 62.027,65.278 h0.76
  text "R" at 60.795,65.265 h0.76
  text "PROG" at 13.868,65.176 h0.76
  text "PL-M6" at 84.1,63.894 h0.76
  text "PL-R6" at 86.604,63.894 h0.76
  text "PL-K12" at 66.027,62.166 h0.76 r90
  text ">" at 28.143,60.147 h0.76
  text "BANK14" at 77.559,59.703 h0.76 r90
  text "1K" at 68.91,59.652 h0.76
  text ">" at 28.169,58.776 h0.76
  text "PL-P5" at 68.453,58.534 h0.76
  text "10K" at 21.196,55.689 h0.76
  text "0R" at 18.199,55.334 h0.76
  text "PL-N4" at 68.425,55.194 h0.76
  text "PL-T3" at 84.126,55.054 h0.76
  text "PL-T4" at 86.604,55.054 h0.76
  text "0R" at 17.348,54.483 h0.76
  text "PS-E26" at 13.995,54.064 h0.76
  text ">" at 37.02,53.023 h1.02 r270
  text ">" at 36.017,52.603 h1.02 r90
  text "PL-R3" at 84.126,52.465 h0.76
  text "PL-M5" at 86.604,52.47 h0.76
  text "PL-T2" at 84.125,49.871 h0.76
  text "PL-N3" at 86.604,49.877 h0.76
  text "PS-E27" at 12.687,49.263 h0.76
  text "PL-R2" at 84.125,47.282 h0.76
  text "PL-M4" at 86.604,47.282 h0.76
  text "0R" at 18.948,44.425 h0.76
  text "0R" at 21.958,42.024 h0.76
  text "BANK34" at 77.554,41.554 h0.76 r90
  text "PS-RST" at 12.687,41.212 h0.76
  text "1M" at 19.723,39.878 h0.76
  text "12pF" at 13.602,38.519 h0.76
  text "50MHz" at 22.492,38.532 h0.76 r45
  text "PL-N2" at 84.125,38.29 h0.76
  text "PL-P1" at 86.604,38.293 h0.76
  text "12pF" at 15.227,36.805 h0.76
  text "C" at 49.073,36.563 h0.76
  text "C" at 21.971,35.7 h0.76 r315
  text "PL-N1" at 84.232,35.695 h0.76
  text "PL-P4" at 86.604,35.697 h0.76
  text "F" at 29.477,34.963 h0.76
  text "<" at 39.281,34.633 h0.76
  text "F" at 44.666,33.934 h0.76
  text "0R" at 24.105,33.617 h0.76
  text "DAC" at 5.651,33.566 h0.76
  text "PS-A6" at 13.373,33.528 h0.76
  text "10uF" at 32.004,33.21 h0.76
  text "20K" at 33.998,33.21 h0.76
  text "20K" at 30.721,33.185 h0.76
  text "PL-M2" at 84.125,33.1 h0.76
  text "PL-P3" at 86.604,33.106 h0.76
  text "C" at 47.104,32.334 h0.76
  text "PS-E24" at 5.651,31.013 h0.76
  text "25K" at 46.507,30.81 h0.76
  text "PL-M1" at 84.232,30.505 h0.76
  text "PL-P1" at 86.604,30.505 h0.76
  text "PS-A7" at 13.297,30.315 h0.76
  text "<" at 26.086,29.858 h0.76
  text "250K" at 46.52,29.515 h0.76
  text "F" at 49.187,29.451 h0.76
  text "2K" at 31.852,28.765 h0.76 r90
  text "PS-E25" at 5.651,28.461 h0.76
  text "1K" at 21.323,28.359 h0.76
  text ">" at 47.053,28.181 h0.76 r270
  text "C" at 46.025,27.241 h0.76 r90
  text ">" at 20.523,26.848 h0.76 r90
  text "C" at 23.546,26.797 h0.76 r90
  text "C" at 30.328,26.657 h0.76 r90
  text "F" at 17.551,26.556 h0.76
  text "RTC" at 5.651,25.908 h0.76
  text "YJ 4-3-0" at 87.884,24.994 h1 r90
  text "<" at 39.281,24.841 h0.76
  text "10R" at 47.485,24.689 h0.76
  text "BANK34" at 77.554,24.625 h0.76 r90
Bottom Overlay:
  text "ADC" at 20.46,74.397 h0.76
  text "ADC" at 22.997,74.397 h0.76
  text "ADC" at 25.535,74.397 h0.76
  text "ADC" at 28.072,74.397 h0.76
  text "ADC" at 30.61,74.397 h0.76
  text "ADC" at 33.147,74.397 h0.76
  text "5V" at 38.011,74.289 h0.76
  text "GND" at 40.754,74.283 h0.76
  text "GND" at 43.294,74.283 h0.76
  text "5V" at 45.618,74.289 h0.76
  text "3V3" at 48.425,74.282 h0.76
  text "3V3" at 53.416,74.282 h0.76
  text "GND" at 56.032,74.283 h0.76
  text "10K" at 85.217,74.041 h0.76 r90
  text "DAC" at 20.436,72.962 h0.76
  text "ADC" at 22.997,72.962 h0.76
  text "ADC" at 25.535,72.962 h0.76
  text "ADC" at 28.072,72.962 h0.76
  text "ADC" at 30.61,72.962 h0.76
  text "ADC" at 33.147,72.962 h0.76
  text "PS-E8" at 38.621,72.949 h0.76
  text "PS-E9" at 41.106,72.949 h0.76
  text "PS-E10" at 43.982,72.949 h0.76
  text "PS-E6" at 46.114,72.949 h0.76
  text "PS-E7" at 48.594,72.949 h0.76
  text "PS-E12" at 51.45,72.949 h0.76
  text "PS-E11" at 53.832,72.949 h0.76
  text "PS-E28" at 56.439,72.949 h0.76
  text "~~" at 70.752,70.561 h0.76
  text "~~" at 72.581,70.574 h0.76
  text ">" at 67.081,69.113 h1.02
  text "1K" at 62.37,68.212 h0.76
  text "~~" at 74.371,67.716 h0.76
  text "1.8K" at 37.694,67.564 h0.76
  text "4.7K" at 51.537,66.484 h0.76
  text "C" at 56.172,66.307 h1.02
  text "1K" at 72.542,66.23 h0.76
  text "2K" at 64.135,66.129 h0.76
  text "C" at 34.582,65.926 h0.76 r270
  text "100R" at 51.156,65.189 h0.76
  text "100R" at 37.744,64.11 h0.76
  text "100R" at 51.156,63.995 h0.76
  text "C" at 59.131,63.983 h1.02
  text "100MHz" at 60.935,63.284 h0.76 r45
  text "4.7K" at 36.487,63.03 h0.76
  text "1.8K" at 51.156,62.7 h0.76
  text "C" at 62.954,62.293 h0.76 r315
  text ">" at 9.957,62.065 h1.02 r180
  text "1K" at 52.718,61.951 h1.02
  text "4.7K" at 36.487,61.9 h0.76
  text "200R" at 36.488,60.604 h0.76
  text "100R" at 31.128,60.173 h0.76
  text "C" at 85.357,59.83 h1.02
  text "100R" at 31.128,58.725 h0.76
  text "49.9" at 45.199,58.674 h0.76 r270
  text ">" at 12.916,57.861 h1.02 r270
  text "1K" at 75.806,57.887 h0.76
  text "100R" at 45.136,56.401 h0.76 r270
  text "<" at 6.82,54.864 h1.02 r180
  text "C" at 43.624,52.908 h1.02
  text "2K" at 35.319,51.524 h0.76
  text "2K" at 38.468,51.537 h0.76
  text "2K" at 15.024,49.987 h0.76 r90
  text "0R" at 25.324,48.933 h0.76
  text "FB" at 24.016,48.489 h0.76
  text "4.7K" at 54.864,47.371 h0.76 r45
  text "C" at 74.727,47.371 h1.02
  text "10K" at 13.652,45.225 h0.76
  text "C" at 14.834,45.225 h0.76
  text "C" at 71.298,44.615 h1.02
  text "10K" at 65.977,43.523 h0.76
  text "10K" at 20.002,43.243 h0.76
  text "C" at 85.293,43.066 h1.02
  text "C" at 61.189,40.856 h0.76
  text "10K" at 67.704,40.576 h0.76
  text "C" at 49.378,39.814 h1.02
  text "C" at 6.947,37.097 h1.02
  text "C" at 65.811,36.144 h0.76
  text "C" at 53.34,35.776 h1.02
  text "10K" at 61.722,34.569 h0.76
  text "C" at 56.286,33.731 h1.02
  text "PS-A29" at 42.913,28.816 h0.76
  text "PS-B1" at 45.237,28.804 h0.76
  text "PS-B3" at 47.904,28.791 h0.76
  text "PS-B5" at 50.33,28.791 h0.76
  text "PL-A7" at 52.908,28.791 h0.76
  text "PS-A9" at 20.942,28.753 h0.76
  text "PS-A11" at 23.684,28.756 h0.76
  text "PS-A19" at 26.265,28.753 h0.76
  text "PS-A15" at 28.737,28.756 h0.76
  text "PS-A17" at 31.222,28.756 h0.76
  text "PS-A13" at 38.621,28.755 h0.76
  text "PL-D6" at 55.423,28.765 h0.76
  text "PL-C6" at 57.975,28.765 h0.76
  text "PS-A25" at 33.68,28.752 h0.76
  text "PS-A12" at 36.149,28.752 h0.76
  text "PL-E6" at 60.376,28.727 h0.76
  text "PL-K5" at 63.068,28.702 h0.76
  text "PL-L5" at 65.481,28.626 h0.76
  text "PS-A16" at 33.68,27.94 h0.76
  text "PS-A8" at 20.948,27.127 h0.76
  text "PS-A10" at 23.684,27.127 h0.76
  text "PS-A5" at 26.265,27.128 h0.76
  text "PS-A14" at 28.737,27.127 h0.76
  text "PS-A24" at 31.222,27.127 h0.76
  text "PS-A26" at 36.175,27.127 h0.76
  text "PS-A27" at 38.636,27.127 h0.76
  text "PS-A28" at 42.951,27.14 h0.76
  text "PS-B0" at 45.225,27.153 h0.76
  text "PS-B2" at 48.057,27.14 h0.76
  text "PS-B4" at 50.267,27.14 h0.76
  text "PL-B7" at 52.883,27.127 h0.76
  text "PL-C7" at 55.448,27.114 h0.76
  text "PL-B6" at 57.925,27.114 h0.76
  text "PL-D5" at 60.376,27.102 h0.76
  text "PL-F5" at 63.005,27.038 h0.76
  text "PL-L4" at 65.456,27.038 h0.76
  text "C" at 85.293,26.251 h1.02

## Text inside footprints (layer, text, board x,y; h text height)
LS1: Top Overlay "+" at 67.246,67.297 h0.76